# Altium PCB PCB1.PcbDoc
Units mm, origin at the board's own origin, x right, y up, seen from the top; angles counter-clockwise.
Board outline 47.5 x 54.5 mm, 2 copper layers (Top Layer, Bottom Layer); 29 components, 26 nets, 145 pads, 38 vias.
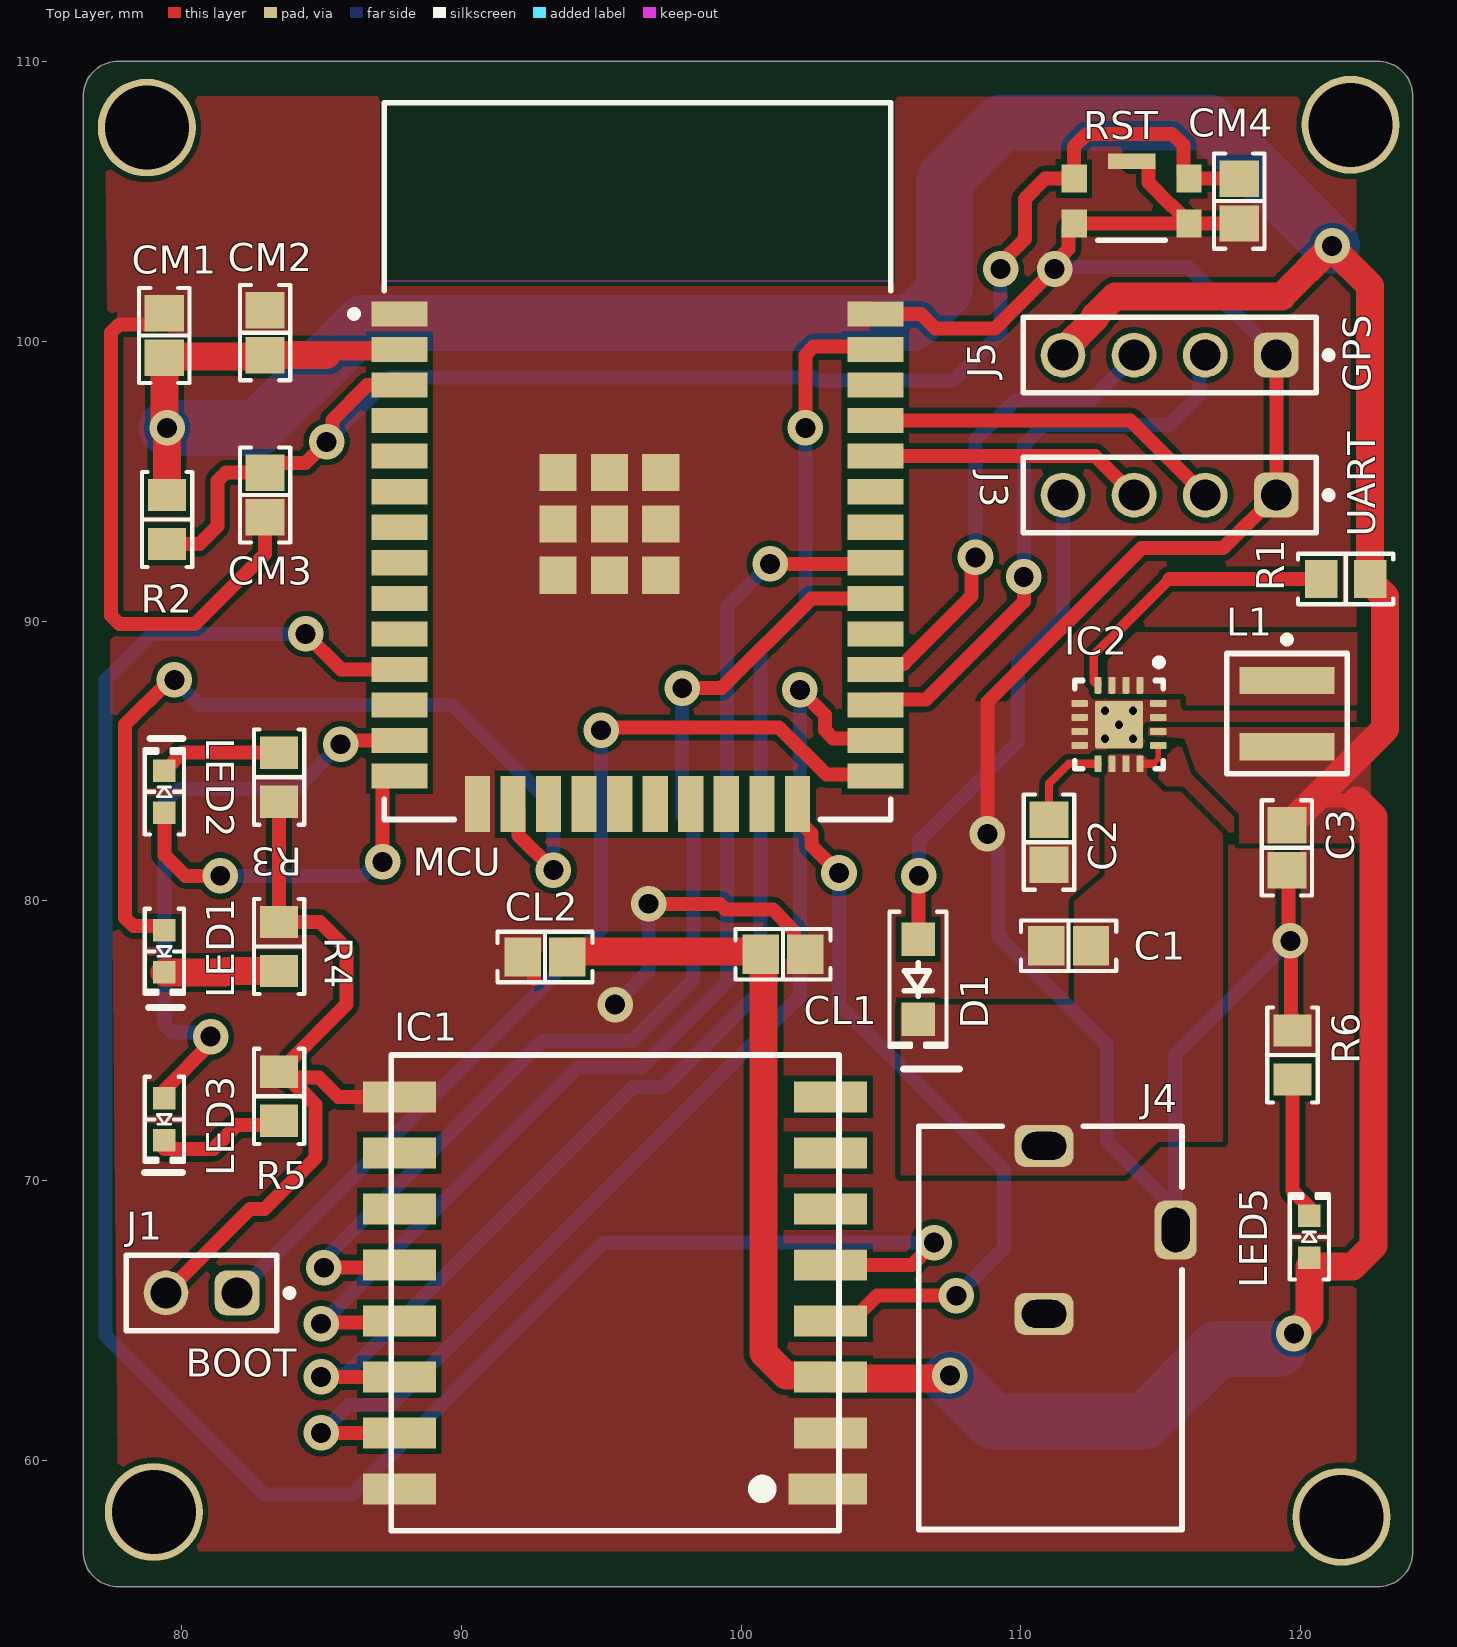
[diagram p0: Top Layer view]
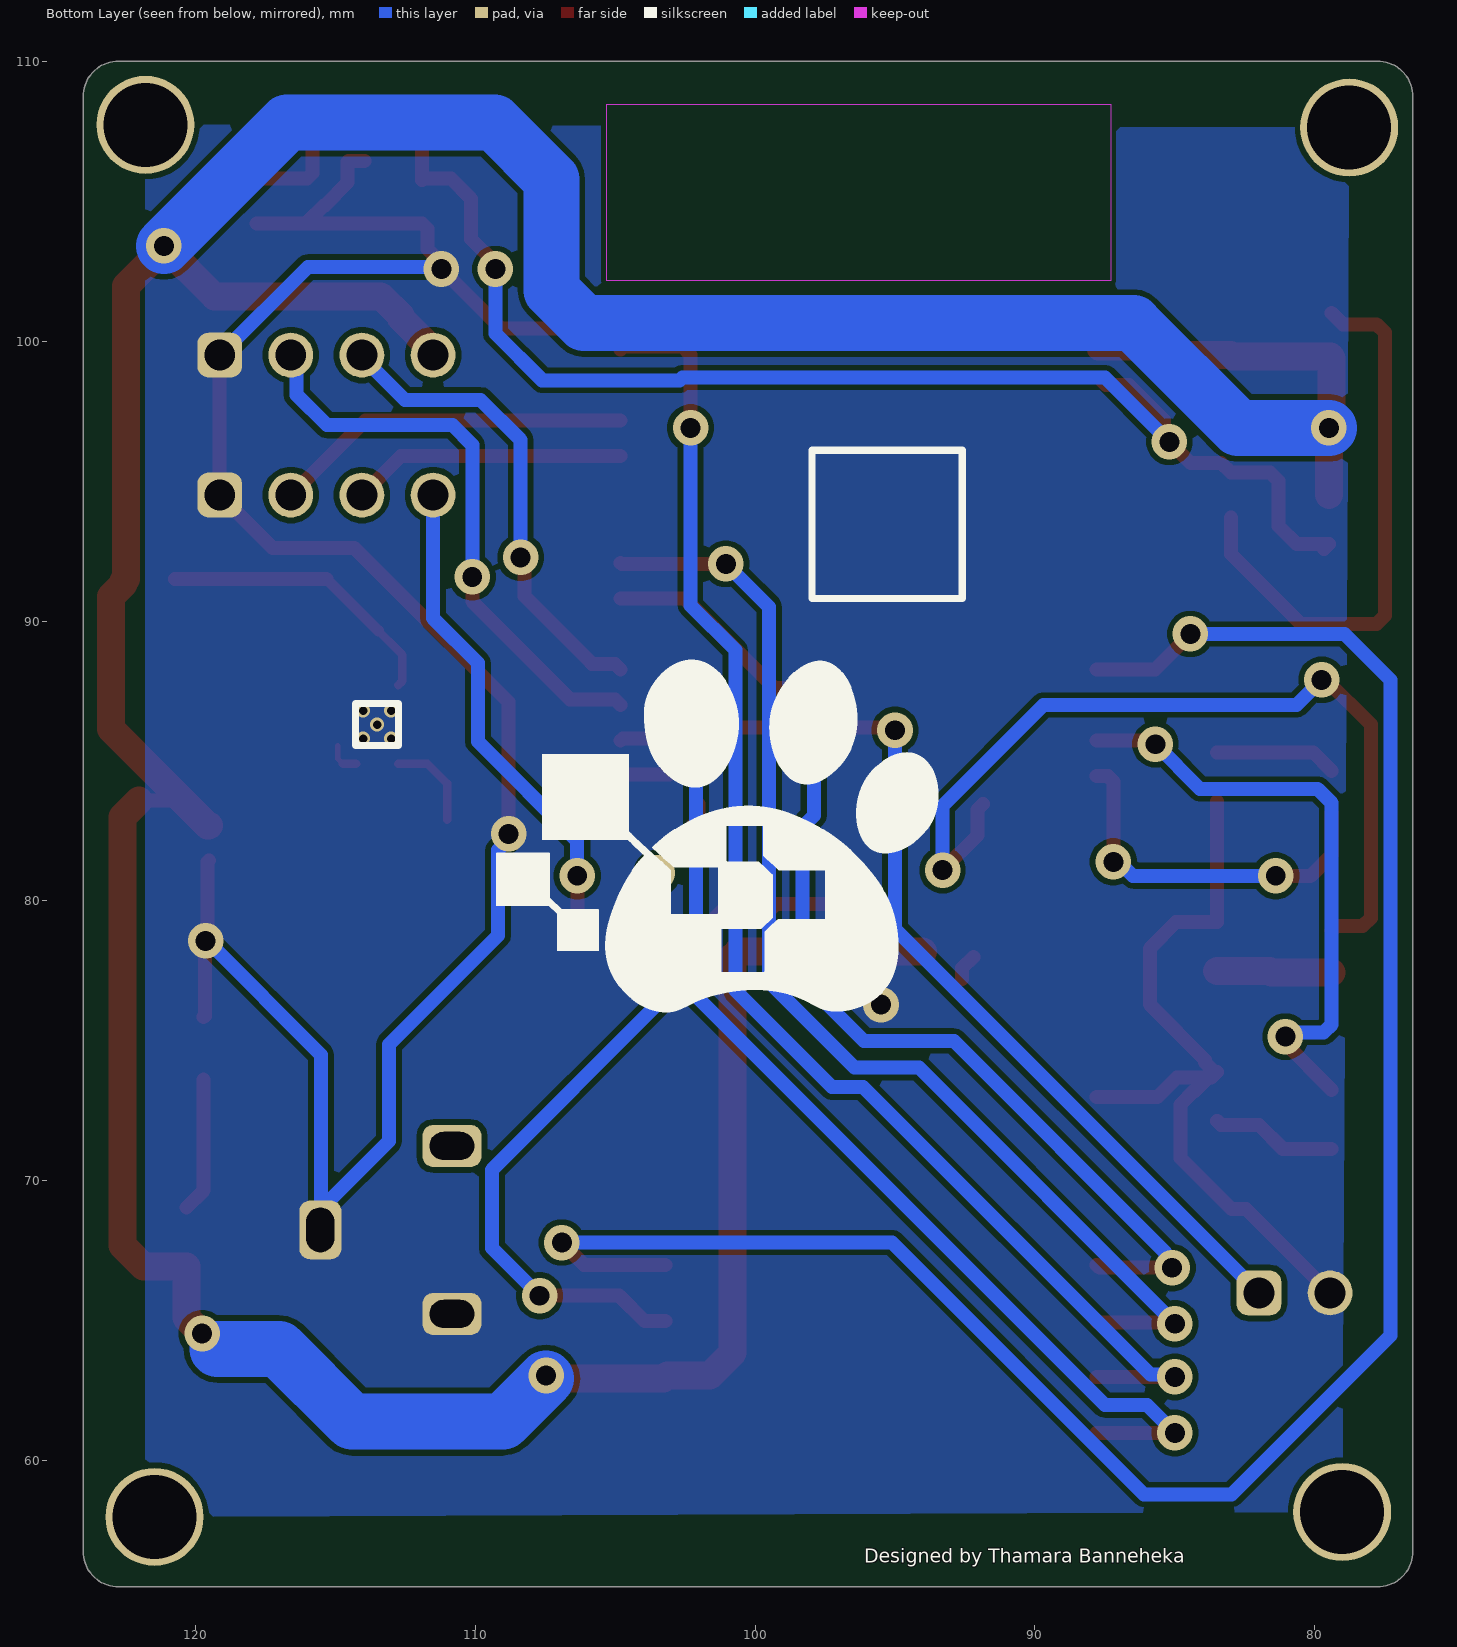
[diagram p1: Bottom Layer view, seen from below]
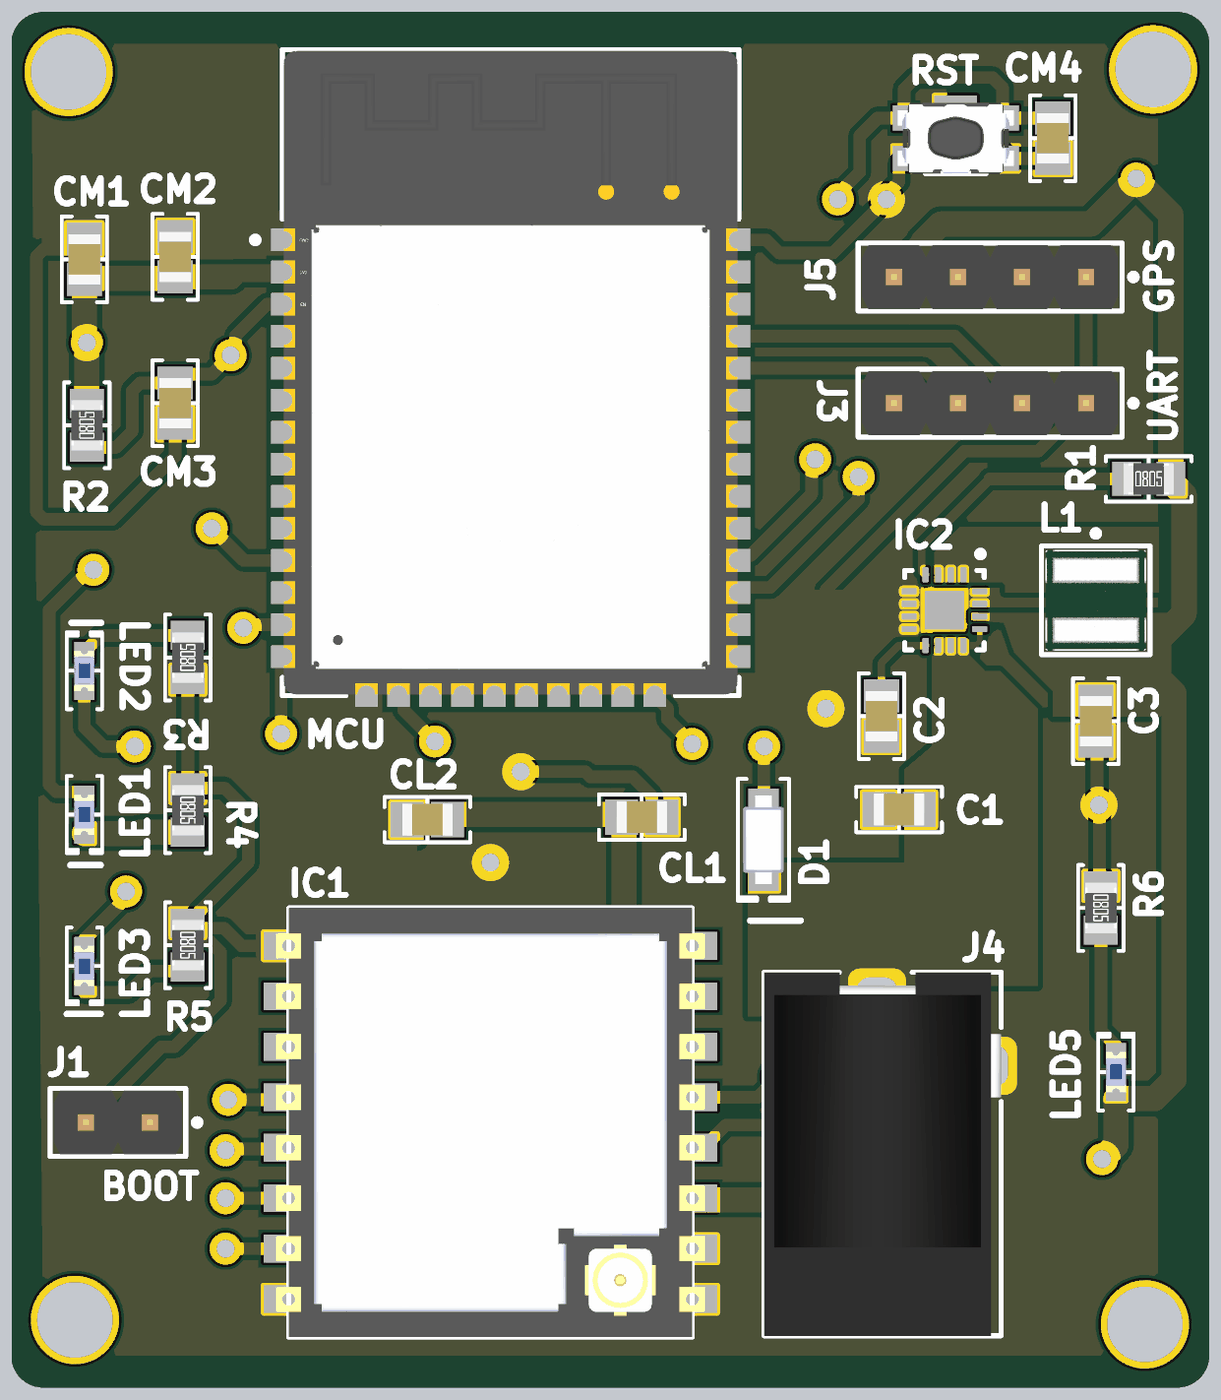
[diagram p2: 3D render of the assembled board from above, using the file's embedded part models]

## Layer stack, top to bottom
Top Solder: solder mask 0.0102, Solder Resist, Dk 3.5
Top Layer: signal copper 0.0356
Dielectric 1: dielectric 0.32, FR-4, Dk 4.8
Bottom Layer: signal copper 0.0356
Bottom Solder: solder mask 0.0102, Solder Resist, Dk 3.5

## Board outline
76.5,56.77 76.5,108.73 cw(c77.77,108.73) 77.77,110 122.73,110 cw(c122.73,108.73) 124,108.73 124,56.77 cw(c122.73,56.77) 122.73,55.5 77.77,55.5 cw(c77.77,56.77)

## Design rules (kind name [scope] priority, off if disabled: settings)
Clearance [All] p1: gap=0.2 ignorepadtopadclearanceinfootprint=TRUE
MinimumSolderMaskSliver [All] p1: minsoldermaskwidth=0.1
NetAntennae [All] p1: netantennaetolerance=0.2
PasteMaskExpansion [All] p1: expansion=0 thpadusebottompaste=TRUE
PlaneConnect [All] p1: pad.planeconnectstyle=Relief pad.reliefexpansion=0.508 pad.reliefentries=4 pad.reliefconductorwidth=0.254 pad.reliefairgap=0.254 via.planeconnectstyle=Direct via.reliefexpansion=0.508 via.reliefentries=4 via.reliefconductorwidth=0.254 via.reliefairgap=0.254
PolygonConnect [All] p1: connectstyle=Direct reliefconductorwidth=0.254 reliefentries=4 polygonreliefangle="90 Angle" airgapwidth=0.254
RoutingVias [All] p1: holewidth=0.2 width=0.15 viastyle="Through Hole" minholewidth=0.2 minwidth=0.1 maxholewidth=0.711 maxwidth=1.27
SilkToSilkClearance [All] p1: silktosilkclearance=0.2
SilkToSolderMaskClearance [IsPad] p1: minsilkscreentomaskgap=0.2 clearancetoexposedcopper=TRUE
SolderMaskExpansion [All] p1 off: expansion=0.102 istentingtop=TRUE soldermaskfromhole=TRUE
SupplyNets "Schematic Supply Nets_2" [InNet('3V3')] p1: voltage=0.000
SupplyNets "Schematic Supply Nets_1" [InNet('VIN')] p2: voltage=0.000
SupplyNets "Schematic Supply Nets" [InNet('GND')] p3: voltage=0.000
UnRoutedNet [All] p1: checkbadconnections=TRUE
Width [All] p1: maxlimit=5 minlimit=0.2 preferedwidth=0.3 minimp=50.000000 maximp=50.000000 favimp=50.000000
23 further rules are at their usual default settings.

## Components (designator, comment, footprint, x,y, rotation, side; value= is the part's Value field where it differs from the comment)
C1 "10 µF" "CAP 0805_2012" 111.7,78.4 r0 top
C2 "3300 pF" "CAP 0805_2012" 111,82.1 r90 top
C3 "0.022 µF" "CAP 0805_2012" 119.5,81.9 r90 top
CL1 "22 µF" "CAP 0805_2012" 101.5,78.1 r180 top
CL2 "0.1 µF" "CAP 0805_2012" 93,78 r0 top
CM1 "22 µF" "CAP 0805_2012" 79.4,100.2 r270 top
CM2 "0.1 µF" "CAP 0805_2012" 83,100.3 r270 top
CM3 "0.1 µF" "CAP 0805_2012" 83,94.5 r90 top
CM4 "0.1 µF" "CAP 0805_2012" 117.8,105 r90 top
D1 "1N4007FLTR" SOD123F 106.325,77.2 r270 top
IC1 "RA-02" RA-02 95.5,66 r180 top
IC2 "TPS62152RGTR" RGT0016C_V 113.5,86.3 r270 top
J1 "BOOT" 61300211121 80.73,66 r180 top
J3 "UART" 61300411121 115.31,94.5 r180 top
J4 "PJ-102AH" "CUI PJ-102AH" 110.825,64.75 r180 top
J5 "GPS" 61300411121 115.31,99.5 r180 top
L1 "2.2uH" FP-XFL4020-MFG 119.5,86.69 r270 top
LED1 "Blue" "LED 0603_1608 BLUE" 79.4,78.2 r270 top
LED2 "Blue" "LED 0603_1608 BLUE" 79.4,83.9 r90 top
LED3 "Blue" "LED 0603_1608 BLUE" 79.4,72.2 r270 top
LED5 "Blue" "LED 0603_1608 BLUE" 120.3,68 r90 top
MCU "ESP32-WROOM-32" FP-ESP32-WROOM-32-MFG 96.3,95.71 r0 top
R1 "100 k" "RES 0805_2012" 121.6,91.5 r0 top
R2 "10 k" "RES 0805_2012" 79.5,93.625 r90 top
R3 "1 k" "RES 0805_2012" 83.5,84.422 r90 top
R4 "1 k" "RES 0805_2012" 83.5,78.375 r270 top
R5 "1 k" "RES 0805_2012" 83.5,73.025 r270 top
R6 "1 k" "RES 0805_2012" 119.7,74.5 r270 top
RST "KMR221GLFS" SW_KMR221GLFS 113.95,105 r0 top

## Footprints (in the part's own frame and the unit in brackets; to place one, negate y for a bottom-side part, rotate by r counter-clockwise, add the part's x,y. Pads: shape width x height; smd on the part's side, far side on the other; paste and mask are expansions set on the pad)
61300211121 [mm] "Pin Header, pitch 2.54 mm, THT, Vertical, single row, 2p"
  rrect50% 1.6x1.6 hole 1.1: 1(-1.27,0)
  round 1.6 hole 1.1: 2(1.27,0)
  silkscreen extent -3.26,-1.35 2.69,1.35, body extent -2.54,-1.27 2.54,1.27, height 8.57
61300411121 [mm] "Pin Header, pitch 2.54 mm, THT, Vertical, single row, 4p"
  rrect50% 1.6x1.6 hole 1.1: 1(-3.81,0)
  round 1.6 hole 1.1: 2(-1.27,0) 3(1.27,0) 4(3.81,0)
  silkscreen extent -5.8,-1.35 5.23,1.34, body extent -5.08,-1.27 5.08,1.27, height 8.57
"CAP 0805_2012" [mm] "Chip Capacitor, 2-Leads, Body 2.00x1.20mm, IPC Medium Density"
  rect 1.3x1.4 smd: 1(-0.8,0) 2(0.8,0)
  silkscreen extent -1.7,-0.9 1.7,0.9, body extent -1,-0.64 1,0.64, height 1.26
"CUI PJ-102AH" [mm] "DC Barrel Jack W/ Switch 2.0x5.5"
  rrect50% 2.1x1.5 hole 1 slot 1.6 at 0 deg: 1(0,-6.5) 2(0,-0.5)
  rrect50% 1.5x2.1 hole 1 slot 1.6 at 90 deg: 3(-4.7,-3.5)
  silkscreen extent -4.92,-7.2 4.47,7.2, body extent -4.92,-7.2 4.47,7.2, height 11
FP-ESP32-WROOM-32-MFG [mm]
  rect 2x0.9 smd paste+0 mask+0: 1(-8.5,5.26) 2(-8.5,3.99) 3(-8.5,2.72) 4(-8.5,1.45) 5(-8.5,0.18) 6(-8.5,-1.09) 7(-8.5,-2.36) 8(-8.5,-3.63) 9(-8.5,-4.9) 10(-8.5,-6.17) 11(-8.5,-7.44) 12(-8.5,-8.71) 13(-8.5,-9.98) 14(-8.5,-11.25) 25(8.5,-11.25) 26(8.5,-9.98) 27(8.5,-8.71) 28(8.5,-7.44) 29(8.5,-6.17) 30(8.5,-4.9) 31(8.5,-3.63) 32(8.5,-2.36) 33(8.5,-1.09) 34(8.5,0.18) 35(8.5,1.45) 36(8.5,2.72) 37(8.5,3.99) 38(8.5,5.26)
  rect 0.9x2 smd paste+0 mask+0: 15(-5.715,-12.25) 16(-4.445,-12.25) 17(-3.175,-12.25) 18(-1.905,-12.25) 19(-0.635,-12.25) 20(0.635,-12.25) 21(1.905,-12.25) 22(3.175,-12.25) 23(4.445,-12.25) 24(5.715,-12.25)
  rect 1.33x1.33 smd paste+0 mask+0: 39(-2.835,-4.075) 39(-2.835,-2.24) 39(-2.835,-0.405) 39(-1,-4.075) 39(-1,-2.24) 39(-1,-0.405) 39(0.835,-4.075) 39(0.835,-2.24) 39(0.835,-0.405)
  Keep-Out Layer region: -9,6.45 9,6.45 9,12.75 -9,12.75
  Keep-Out Layer region: -9,6.45 9,6.45 9,12.75 -9,12.75
  silkscreen extent -10.25,-12.8 9.05,12.8, body extent -9.6,-13.35 9.6,12.9, height 0.25
FP-XFL4020-MFG [mm]
  rect 0.98x3.4 smd paste+0 mask+0: 1(-1.185,0) 2(1.185,0)
  silkscreen extent -2.77,-2.15 2.15,2.15, body extent -2.25,-2.25 2.25,2.25, height 0.25
"LED 0603_1608 BLUE" [mm] "Chip Diode, 2-Leads, Body 1.60x0.80mm, IPC Medium Density"
  rect 0.8x0.8 smd: 1(-0.75,0) 2(0.75,0)
  silkscreen extent -1.52,-0.7 1.52,0.7, body extent -0.8,-0.4 0.8,0.4, height 0.53
RA-02 [mm]
  rect 2.8x1.1 smd: 1(-7.6,7)
  rect 2.6x1.1 smd: 2(-7.7,5) 3(-7.7,3) 4(-7.7,1) 5(-7.7,-1) 6(-7.7,-3) 7(-7.7,-5) 8(-7.7,-7) 9(7.7,-7) 10(7.7,-5) 11(7.7,-3) 12(7.7,-1) 13(7.7,1) 14(7.7,3) 15(7.7,5) 16(7.7,7)
  silkscreen extent -8,-8.5 8,8.5, body extent -8.5,-8.5 8.5,8.5, height 3.3
"RES 0805_2012" [mm] "Chip Resistor, 2-Leads, Body 2.00x1.25mm, IPC Medium Density"
  rect 1.15x1.35 smd: 1(-0.875,0) 2(0.875,0)
  silkscreen extent -1.7,-0.9 1.7,0.9, body extent -1,-0.62 1,0.63, height 0.6
RGT0016C_V [mm] "QFN, 16-Leads, Body 3x3mm, Pitch 0.5mm, Thermal Pad 1.65x1.65mm"
  rrect40% 0.6x0.25 smd: 1(-1.4,0.75) 2(-1.4,0.25) 3(-1.4,-0.25) 4(-1.4,-0.75) 9(1.4,-0.75) 10(1.4,-0.25) 11(1.4,0.25) 12(1.4,0.75)
  rrect40% 0.25x0.6 smd: 5(-0.75,-1.4) 6(-0.25,-1.4) 7(0.25,-1.4) 8(0.75,-1.4) 13(0.75,1.4) 14(0.25,1.4) 15(-0.25,1.4) 16(-0.75,1.4)
  rrect6% 1.7x1.7 smd paste-0.85: 17(0,0)
  rrect6% 1.55x1.55 on Top Paste: 17(0,0)
  silkscreen extent -2.35,-1.58 1.57,1.58, body extent -1.5,-1.5 1.5,1.5, height 1
SOD123F [mm] "SODFL, 2-Leads, Body 1.60x3.50mm, IPC Medium Density"
  rect 1.2x1.2 smd: 1(-1.43,0) 2(1.43,0)
  silkscreen extent -2.41,-1.02 2.41,1.02, body extent -1.75,-0.8 1.75,0.8, height 1.1
SW_KMR221GLFS [mm]
  rect 0.9x1 smd: 1(-2.05,0.8) 2(-2.05,-0.8) 3(2.05,-0.8) 4(2.05,0.8)
  rect 1.7x0.55 smd: 5(0,1.425)
  silkscreen extent -1.2,-1.4 1.2,-1.4, body extent -2.3,-1.4 2.3,1.4, height 1.9

## Part data
C1: library part C2012X6S1C106K125AC, "CAP CER 10UF 16V X6S 0805", Device Package="0805 (2012 Metric)", manufacturer="TDK Corporation", Operating Temperature="-55°C ~ 105°C", Supplier Part Number 1=445-7611-1-ND, Temperature Coefficient=X6S, Tolerance=±10%, Voltage - Rated=16V, Applications="General Purpose", Capacitance="10 µF", componentlink1description=Datasheet, componentlink1url=https://product.tdk.com/info/en/catalog/datasheets/mlcc_commercial_general_en.pdf?ref_disty=digikey, componentlink2description="DigiKey Link", componentlink2url=https://www.digikey.com/en/products/detail/tdk-corporation/C2012X6S1C106K125AC/2733046, Features="Low ESL", lastupdated="2/9/2024 8:16:08 PM", Lifecycle Status=Active, Minimum Order=1, Mounting Type="Surface Mount, MLCC", Package / Case="0805 (2012 Metric)", packaging=TapeAndReel, Part Number=C2012X6S1C106K125AC, Part Status=Active, partid=2995, price=0.06, series=C, Size / Dimension="0.079\" L x 0.049\" W (2.00mm x 1.25mm)", Supplier 1=DigiKey, Thickness (Max)="0.057\" (1.45mm)"
C2: library part C0805C332F5GECAUTO, "CAP CER 0805 3.3NF 50V C0G 1%", Capacitance="3.3 nF", Device Package="0805 (2012 Metric)", manufacturer=KEMET, Operating Temperature="-55°C ~ 125°C", Ratings=AEC-Q200, Supplier Part Number 1=399-C0805C332F5GECAUTOCT-ND, Temperature Coefficient="C0G, NP0", Tolerance=±1%, Voltage - Rated=50V, Applications="Automotive, ESD Protection", componentlink1description=Datasheet, componentlink1url=https://api.kemet.com/component-edge/download/datasheet/C0805C332F5GECAUTO.pdf, componentlink2description="DigiKey Link", componentlink2url=https://www.digikey.com/en/products/detail/kemet/C0805C332F5GECAUTO/8647273, Features="Low ESL", lastupdated="2/9/2024 8:15:00 PM", Lifecycle Status=Active, Minimum Order=1, Mounting Type="Surface Mount, MLCC", Package / Case="0805 (2012 Metric)", packaging=TapeAndReel, Part Number=C0805C332F5GECAUTO, Part Status=Active, partid=41544, price=0.27, series="ESD SMD Auto C0G", Size / Dimension="0.079\" L x 0.049\" W (2.00mm x 1.25mm)", Supplier 1=DigiKey, Thickness (Max)="0.035\" (0.88mm)"
C3: library part C0805C223K5RECAUTO, "CAP CER 0805 22NF 50V X7R 10%", Capacitance="22 uF", Device Package="0805 (2012 Metric)", manufacturer=KEMET, Operating Temperature="-55°C ~ 125°C", Ratings=AEC-Q200, Supplier Part Number 1=399-17886-1-ND, Temperature Coefficient=X7R, Tolerance=±10%, Voltage - Rated=50V, Applications="Automotive, ESD Protection", componentlink1description=Datasheet, componentlink1url=https://api.kemet.com/component-edge/download/datasheet/C0805C223K5RECAUTO.pdf, componentlink2description="DigiKey Link", componentlink2url=https://www.digikey.com/en/products/detail/kemet/C0805C223K5RECAUTO/8640480, lastupdated="2/9/2024 8:15:30 PM", Lifecycle Status=Active, Minimum Order=1, Mounting Type="Surface Mount, MLCC", Package / Case="0805 (2012 Metric)", packaging=TapeAndReel, Part Number=C0805C223K5RECAUTO, Part Status=Active, partid=15719, price=0.04, series="ESD SMD Auto X7R", Size / Dimension="0.079\" L x 0.049\" W (2.00mm x 1.25mm)", Supplier 1=DigiKey, Thickness (Max)="0.035\" (0.88mm)"
CL1 CM1: library part CL21A226KOQNNNG, "CAP CER 22UF 16V X5R 0805", Device Package="0805 (2012 Metric)", manufacturer="Samsung Electro-Mechanics", Operating Temperature="-55°C ~ 85°C", Supplier Part Number 1=1276-7092-1-ND, Temperature Coefficient=X5R, Tolerance=±10%, Voltage - Rated=16V, Applications="General Purpose", Capacitance="22 µF", componentlink1description=Datasheet, componentlink1url=//media.digikey.com/pdf/Data%20Sheets/Samsung%20PDFs/CL21A226KOQNNNG_Spec.pdf, componentlink2description="DigiKey Link", componentlink2url=https://www.digikey.com/en/products/detail/samsung-electro-mechanics/CL21A226KOQNNNG/3894433, lastupdated="2/9/2024 8:16:07 PM", Lifecycle Status=Active, Minimum Order=1, Mounting Type="Surface Mount, MLCC", Package / Case="0805 (2012 Metric)", packaging=TapeAndReel, Part Number=CL21A226KOQNNNG, Part Status=Active, partid=3000, price=0.06, series=CL, Size / Dimension="0.079\" L x 0.049\" W (2.00mm x 1.25mm)", Supplier 1=DigiKey, Thickness (Max)="0.055\" (1.40mm)"
CL2 CM2 CM3 CM4: library part CC0805MRX7R9BB104, "CAP CER 0.1UF 50V X7R 0805", Device Package="0805 (2012 Metric)", manufacturer=Yageo, Operating Temperature="-55°C ~ 125°C", Supplier Part Number 1=311-4351-1-ND, Temperature Coefficient=X7R, Tolerance=±20%, Voltage - Rated=50V, Applications="General Purpose", Capacitance="0.1 µF", componentlink1description=Datasheet, componentlink1url=https://www.yageo.com/upload/media/product/productsearch/datasheet/mlcc/UPY-GPHC_X7R_6.3V-to-50V_18.pdf, componentlink2description="DigiKey Link", componentlink2url=https://www.digikey.com/en/products/detail/yageo/CC0805MRX7R9BB104/5884281, lastupdated="2/9/2024 8:16:09 PM", Lifecycle Status=Active, Minimum Order=1, Mounting Type="Surface Mount, MLCC", Package / Case="0805 (2012 Metric)", packaging=TapeAndReel, Part Number=CC0805MRX7R9BB104, Part Status=Active, partid=2475, price=0.01, series=CC, Size / Dimension="0.079\" L x 0.049\" W (2.00mm x 1.25mm)", Supplier 1=DigiKey, Thickness (Max)="0.037\" (0.95mm)"
D1: "STANDARD RECTIFIER 1000V SOD-123", Capacitance @ Vr, F="15pF @ 4V, 1MHz", Current - Average Rectified (Io)=1A, Current - Reverse Leakage @ Vr="5µA @ 1000V", manufacturer="SMC Diode Solutions", Package / Case=SOD-123F, Supplier Device Package=SOD-123FL, Supplier Part Number 1=1655-1N4007FLCT-ND, Voltage - DC Reverse (Vr) (Max)=1000V, Voltage - Forward (Vf) (Max) @ If="1.1V @ 1A", componentlink1description=Datasheet, componentlink1url=http://www.smc-diodes.com/propdf/1N4001FL-1N4007FL%20N1646%20REV.A.pdf, componentlink2description="DigiKey Link", componentlink2url=http://digikey.com/product-detail/en/smc-diode-solutions/1N4007FLTR/1655-1N4007FLCT-ND/11657827, Diode Type=Standard, lastupdated="8/30/2020 8:59:55 PM", Lifecycle Status=Active, Minimum Order=1, Mounting Type="Surface Mount", packaging=TapeAndReel, Part Number=1N4007FLTR, partid=3314, price=0.01, Speed="Standard Recovery >500ns, > 200mA (Io)", Supplier 1=DigiKey
IC1: library part CMP-006-000001-1, "General ISM < 1GHz LoRaâ„¢ Transceiver Module 410MHz ~ 525MHz Antenna Not Included, I-PEX Surface Mount", Package=None, Availability="Not in stock", Check_prices=https://www.snapeda.com/parts/RA-02/AI-Thinker/view-part/?ref=eda, Component Type=Standard, Design Item ID=RA-02, MF=Ai-Thinker, MP=RA-02, Pin Count=16, price=None, SnapEDA_Link=https://www.snapeda.com/parts/RA-02/AI-Thinker/view-part/?ref=snap, Source=RA-02.SchLib
IC2: library part CMP-0323-00110-3, "Buck Step Down Regulator with 3 to 17 V Input and 3.3 V Output, -40 to 85 degC, 16-Pin QFN (RGT), Green (RoHS & no Sb/Br)", manufacturer="Texas Instruments", Rating=Catalog, Switch Current Limit(Typ)(A)=1.7, Code_JEDEC=MO-220, componentlink1description=Datasheet, componentlink1url=http://www.ti.com/general/docs/lit/getliterature.tsp?genericPartNumber=TPS62152&fileType=pdf, componentlink2description="Package Specification", componentlink2url=http://www.ti.com/litv/pdf/mpqf119g, ComponentLink3Description="URL Link1", ComponentLink3URL="Samples URL:http://www.ti.com/product/tps62152#samples", DatasheetVersion=SLVSAL5, Duty Cycle(Max)(%)=100, Eco-Plan="Green (RoHS & no Sb/Br)", Iout(Max)(A)=1, Iq(Typ)(mA)=0.017, Mounting Technology="Surface Mount", PackageDescription="16-Pin Plastic Quad Flat No-Lead, 3 x 3 mm Body, 0.5 mm Pitch, 1.7 x 1.7 mm Exposed Pad", PackageReference=RGT0016C, PackageVersion="revH, Oct-2011", PartNumber=TPS62152RGTR, Preset Vout(V)=3.3, Regulated Outputs(#)=1, SubFamily="Step-Down Regulator", Synchronous Rectification=TRUE, Topology=Buck, Vin(Max)(V)=17, Vin(Min)(V)=3, Vout(Max)(V)=3.3, Vout(Min)(V)=3.3
J1: library part 61300211121, "WR-PHD Pin Header, THT, Vertical, pitch 2.54mm, 1 Row, 2P", Contact Resistance=20mOhm, manufacturer="Wurth Elektronik", Operating Temperature Max=105°C, Operating Temperature Min=-40°C, Rated Current=3A, Withstanding Voltage=500V, Working Voltage=250V, Category="Board-to-Board Connectors", componentlink1description="Website Link", componentlink1url=https://www.we-online.com/redexpert/article/61300211121?ad, componentlink2description="Datasheet Link", componentlink2url=https://www.we-online.com/redexpert/spec/61300211121?ad, Gender="Pin Header", Manufacturer Part Number=61300211121, Match Code=WR-PHD, Mount="Through Hole", Number of Pins=2, Number of Rows=1, Orientation=Vertical, packaging=Bag, Pitch=2.54mm
J3 J5: library part 61300411121, "WR-PHD Pin Header, THT, Vertical, pitch 2.54mm, 1 Row, 4P", Contact Resistance=20mOhm, manufacturer="Wurth Elektronik", Operating Temperature Max=105°C, Operating Temperature Min=-40°C, Rated Current=3A, Withstanding Voltage=500V, Working Voltage=250V, Category="Board-to-Board Connectors", componentlink1description="Website Link", componentlink1url=https://www.we-online.com/redexpert/article/61300411121?ad, componentlink2description="Datasheet Link", componentlink2url=https://www.we-online.com/redexpert/spec/61300411121?ad, Gender="Pin Header", Manufacturer Part Number=61300411121, Match Code=WR-PHD, Mount="Through Hole", Number of Pins=4, Number of Rows=1, Orientation=Vertical, packaging=Bag, Pitch=2.54mm
J4: "CONN PWR JACK 2X5.5MM SOLDER", Current Rating (Amps)=5A, manufacturer="CUI Devices", Material Flammability Rating="UL94 V-0", Supplier Part Number 1=CP-102AH-ND, Voltage - Rated=24VDC, Actual Diameter="0.079\" (2.00mm ID), 0.256\" (6.50mm OD)", componentlink1description=Datasheet, componentlink1url=https://www.cuidevices.com/product/resource/digikeypdf/pj-102ah.pdf, componentlink2description="DigiKey Link", componentlink2url=//digikey.com/product-detail/en/cui-devices/PJ-102AH/CP-102AH-ND/408448, Connector Type=Jack, Gender=Male, Industry Recognized Mating Diameter="2.00mm ID (0.079\"), 5.50mm OD (0.217\")", Internal Switch(s)="Single Switch, Normally Closed", lastupdated="12/16/2019 7:01:27 PM", Lifecycle Status=0, Mating Length/Depth="0.354\" (9.00mm)", Minimum Order=1, Mounting Type="Through Hole, Right Angle", Number of Positions/Contacts="2 Conductors, 3 Contacts", packaging=Tray, Part Number=PJ-102AH, Part Status=Active, price=0.76, series=-, Shielding=Unshielded, Supplier 1=DigiKey, Termination=Solder
L1: library part CMP-2000-05090-4, "INDUCTOR, 2.2UH, 8A, 20%, 38MHZ, REEL", Case/Package=SMD/SMT, DC Resistance (DCR)=23.5mR, Inductance Tolerance=20%, Max DC Current=8A, Max Operating Temperature=125°C, Min Operating Temperature=-40°C, Saturation Current=3.1A, Self Resonant Frequency=38MHz, Test Frequency=100kHz, Core Material=Composite, Height=2.1mm, Inductance=2.2uH, Lead Free="Contains Lead", Length=4.3mm, Mount="Surface Mount", packaging="Tape and Reel", REACH SVHC="No SVHC", RMS Current (Irms)=8A, RoHS Compliant=Yes, series=XFL4020, Shielding=Shielded, Termination=SMD/SMT, Tolerance=20%, Width=4.3mm
LED1 LED2 LED3: library part SM0603UBWC, "LED BLUE CLEAR 0603 SMD", Current - Test=20mA, Device Package="0603 (1608 Metric)", Lens Color=Colorless, manufacturer="Bivar Inc.", Millicandela Rating=115mcd, Supplier Device Package=0603, Supplier Part Number 1=492-1327-1-ND, Voltage - Forward (Vf) (Typ)=3V, Color=Blue, componentlink1description=Datasheet, componentlink1url=https://www.bivar.com/Files/Datasheets/SM0603UBWC.pdf, componentlink2description="DigiKey Link", componentlink2url=https://www.digikey.com/en/products/detail/bivar-inc/SM0603UBWC/2408546, Configuration=Standard, Height (Max)=0.80mm, lastupdated="6/3/2024 7:57:52 PM", Lens Size="1.00mm x 0.80mm", Lens Style="Rectangle with Flat Top", Lens Transparency=Clear, Lifecycle Status=Active, Minimum Order=1, Mounting Type="Surface Mount", Package / Case="0603 (1608 Metric)", packaging=TapeAndReel, Part Number=SM0603UBWC, Part Status=Active, partid=807, price=0.46, series=-, Size / Dimension="1.60mm L x 0.80mm W", Supplier 1=DigiKey, Viewing Angle=130°, Wavelength - Dominant=470nm, Wavelength - Peak=468nm
LED5: library part LSM0603463V, "LED BLUE CLEAR CHIP 0603 SMD", Current - Test=20mA, Device Package="0603 (1608 Metric)", Lens Color=Colorless, manufacturer="Visual Communications Company - VCC", Millicandela Rating=20mcd, Supplier Device Package="Chip LED", Supplier Part Number 1=LSM0603463VCT-ND, Voltage - Forward (Vf) (Typ)=3V, Color=Blue, componentlink1description=Datasheet, componentlink1url=https://vcclite.com/wp-content/uploads/wpallimport/files/files/LSM0603463V.pdf, componentlink2description="DigiKey Link", componentlink2url=https://www.digikey.com/en/products/detail/visual-communications-company-vcc/LSM0603463V/9486725, Configuration=Standard, Height (Max)=0.50mm, lastupdated="6/3/2024 7:57:52 PM", Lens Size="1.20mm x 0.80mm", Lens Style="Rectangle with Flat Top", Lens Transparency=Clear, Lifecycle Status=Active, Minimum Order=1, Mounting Type="Surface Mount", Package / Case="0603 (1608 Metric)", packaging=TapeAndReel, Part Number=LSM0603463V, Part Status=Active, partid=781, price=0.12, series=LSM0603, Size / Dimension="1.60mm L x 0.80mm W", Supplier 1=DigiKey, Viewing Angle=120°, Wavelength - Dominant=469nm, Wavelength - Peak=469nm
MCU: library part CMP-194065-000008-1, "RX TXRX MOD WIFI SURFACE MOUNT", Case/Package=SMD/SMT, Frequency=2.5GHz, Max Operating Temperature=85°C, Min Operating Temperature=-40°C, Operating Supply Voltage=3.6V, Package Quantity=550, Data Rate=150Mbps, Mount="Surface Mount", packaging="Cut Tape", Sensitivity=-98dBm, Weight=0.088185oz
R1 R2: library part RCS0805100KFKEA, "RES SMD 100K OHM 1% 1/2W 0805", Device Package="0805 (2012 Metric)", manufacturer="Vishay Dale", Operating Temperature="-55°C ~ 155°C", Power (Watts)="0.5W, 1/2W", Ratings=AEC-Q200, Resistance="100 kOhms", Supplier Device Package=0805, Supplier Part Number 1=541-2850-1-ND, Temperature Coefficient=±100ppm/°C, Tolerance=±1%, componentlink1description=Datasheet, componentlink1url=http://www.vishay.com/docs/20065/rcse3.pdf, componentlink2description="DigiKey Link", componentlink2url=https://www.digikey.com/en/products/detail/vishay-dale/RCS0805100KFKEA/5866996, Composition="Thick Film", Features="Automotive AEC-Q200, Pulse Withstanding", Height - Seated (Max)="0.020\" (0.50mm)", lastupdated="2/8/2024 9:02:38 PM", Lifecycle Status=Active, Minimum Order=1, Number of Terminations=2, Package / Case="0805 (2012 Metric)", packaging=TapeAndReel, Part Number=RCS0805100KFKEA, Part Status=Active, partid=27789, price=0.02, series="RCS e3", Size / Dimension="0.079\" L x 0.049\" W (2.00mm x 1.25mm)", Supplier 1=DigiKey
R3 R4 R5 R6: library part RCS0805100KFKEA, "RES SMD 100K OHM 1% 1/2W 0805", Device Package="0805 (2012 Metric)", manufacturer="Vishay Dale", Operating Temperature="-55°C ~ 155°C", Power (Watts)="0.5W, 1/2W", Ratings=AEC-Q200, Resistance="1 kOhms", Supplier Device Package=0805, Supplier Part Number 1=541-2850-1-ND, Temperature Coefficient=±100ppm/°C, Tolerance=±1%, componentlink1description=Datasheet, componentlink1url=http://www.vishay.com/docs/20065/rcse3.pdf, componentlink2description="DigiKey Link", componentlink2url=https://www.digikey.com/en/products/detail/vishay-dale/RCS0805100KFKEA/5866996, Composition="Thick Film", Features="Automotive AEC-Q200, Pulse Withstanding", Height - Seated (Max)="0.020\" (0.50mm)", lastupdated="2/8/2024 9:02:38 PM", Lifecycle Status=Active, Minimum Order=1, Number of Terminations=2, Package / Case="0805 (2012 Metric)", packaging=TapeAndReel, Part Number=RCS0805100KFKEA, Part Status=Active, partid=27789, price=0.02, series="RCS e3", Size / Dimension="0.079\" L x 0.049\" W (2.00mm x 1.25mm)", Supplier 1=DigiKey
RST: library part CMP-009-000003-1, "Switch Tactile N.O. SPST Button Gull Wing 0.05A 32VDC 1VA 200000Cycles 2N SMD Automotive T/R", Package=None, Availability=Unavailable, Component Type=Standard, Design Item ID=KMR221GLFS, MP=KMR221GLFS, Pin Count=5, price=None, Source=KMR221GLFS.SchLib

## Free pads (board coordinates)
  round 3.5 hole 3: 1(79.025,58.175) 2(121.775,107.725) 3(78.775,107.625) 4(121.45,58)

## Via types
v1: diameter 1.27, hole 0.711, Top Layer to Bottom Layer, 33 vias
v2: diameter 0.5, hole 0.3, Top Layer to Bottom Layer, 5 vias

## Nets (pads, with @x,y where several pads share a name; then routed paths per layer and width w, separated by ;. In a path a pad name is that pad's centre, name@x,y a point inside that pad or via, vN(x,y) a via of type N, cw(c..) or ccw(c..) an arc to the next point about the centre after c; other vN are vias at no path point)
3V3: C3.2 CL1.2 CL2.2 CM1.2 CM2.2 IC1.3 IC2.14 J5.4 L1.2 LED5.1 MCU.2 R1.2 R2.2 | length 162.8
  Top Layer w0.5: CL2.2 CL2.2@94,78.2 ; CL1.2@100.6,78.2 CL1.2 CL1.2@100.8,78 ; IC1.3 IC1.3@103.26,62.94 ; 120.465,83.593 122.007,83.593
  Top Layer w0.7: 85.2,99.5 85.35,99.65 87.75,99.65 MCU.2
  Top Layer w1: R2.2 v1(79.5,96.9) 79.5,96.973 79.4,97.073 CM1.2 79.45,99.45 82.95,99.45 CM2.2 85.2,99.5 ; CL2.2@94,78.2 CL1.2@100.6,78.2 ; CL1.2@100.8,78 100.8,63.858 101.608,63.05 103.15,63.05 IC1.3 ; IC1.3@103.26,62.94 v1@107.46,62.94 ; J5.4 111.5,99.662 112.653,100.815 112.653,100.893 113.36,101.6 119.315,101.6 v1(121.115,103.4) 121.115,103.327 122.475,101.967 R1.2 122.55,91.425 122.55,91.325 123,90.875 123,86.15 119.55,82.7 C3.2 ; v1(119.75,64.55) 120.3,65.1 120.3,66.95 121.85,66.95 122.6,67.7 122.6,83 122.007,83.593
  Bottom Layer w2: v1(79.5,96.9) 82.75,96.9 86.489,100.639 106.103,100.639 107.275,101.811 107.275,105.775 109.3,107.8 116.715,107.8 v1(121.115,103.4) ; v1@107.46,62.94 109,61.4 114.4,61.4 117,64 119.2,64
  other v1: 107.46,63.05
EN: CM3.2 CM4.2 MCU.3 R2.1 RST.1 RST.4 | length 53.6
  Top Layer w0.5: R2.1@79.675,92.575 R2.1 80.65,92.75 81.3,93.4 81.3,95 81.6,95.3 CM3.2 83.35,95.65 84.45,95.65 v1(85.2,96.4) 85.4,96.6 85.4,97.176 86.649,98.425 87.465,98.425 MCU.3@87.665,98.625 ; v1(109.275,102.575) 109.275,102.783 110.138,103.646 110.138,105.083 110.855,105.8 RST.1 ; RST.1@111.9,105.75 111.9,106.95 112.35,107.4 115.4,107.4 115.8,107 115.8,106 RST.4 CM4.2
  Bottom Layer w0.5: v1(85.2,96.4) 87.5,98.7 102.59,98.7 102.69,98.6 107.6,98.6 109.275,100.275 v1(109.275,102.575)
GND: C1.1 C2.1 C3.1 CL1.1 CL2.1 CM1.1 CM2.1 CM3.1 CM4.1 IC1.1 IC1.2 IC1.9 IC1.16 IC2.5 IC2.6 IC2.7 IC2.8 IC2.15 IC2.16 IC2.17@113.5,86.3 J1.2 J3.1 J4.2 J4.3 J5.1 MCU.1 MCU.15 MCU.38 MCU.39 R3.1 R4.1 R5.1 R6.1 RST.2 RST.3 RST.5 | length 144.2
  Top Layer w0.5: CM1.1 79,100.6 77.793,100.6 77.5,100.307 77.5,90.193 77.793,89.9 80.503,89.9 83,92.397 CM3.1 ; J1.2 82.46,69 82.979,69 84.8,70.821 84.8,72.736 84.315,73.221 84.279,73.221 R5.1@83.8,73.7 ; R3.1 R4.1 84.957,79.25 85.9,78.307 85.9,76.3 83.925,74.325 83.925,74.225 83.6,73.9 R5.1 83.7,73.7 R5.1@83.8,73.7 ; IC1.9 85.625,73 84.925,73.7 R5.1@83.8,73.7 ; CL2.1 92.6,77.6 92.6,77.214 ; v1(96.7,79.9) 99.254,79.9 99.454,79.7 101.136,79.7 101.9,78.936 101.9,78.5 CL1.1 ; MCU.38 106.43,100.97 106.948,100.452 109.078,100.452 v1(111.2,102.575) 111.2,102.783 111.7,103.283 111.7,104 RST.2 RST.3 ; v1(108.8,82.4) 108.8,87.1 114.3,92.6 117.22,92.6 J3.1 J5.1 ; RST.5 114.525,106.425 114.55,106.4 114.55,105.664 115.364,104.85 115.4,104.85 116,104.25 RST.3 ; CM4.1 RST.3 ; C3.1@119.5,81.45 119.55,81.4 v1@119.55,78.65 ; v1@119.65,78.55 119.65,75.9 R6.1@119.7,75.85
  Bottom Layer w0.5: v1@95.6,76.4 96.7,77.5 v1(96.7,79.9) ; v1(108.8,82.4) 108.8,82.192 109.175,81.817 109.175,78.775 113.075,74.875 113.075,71.425 J4.3@115.5,69 ; v1(111.2,102.575) 111.273,102.648 115.972,102.648 J5.1 ; J4.3@115.5,68.7 J4.3@115.5,69 ; v1@119.55,78.65 v1@119.6,78.6 ; v1@119.65,78.55 v1(119.625,78.575) v1@119.6,78.6 ; J4.3@115.5,69 115.5,74.5 v1@119.6,78.6
  other v1: 95.5,76.3
  other v2: 113,85.8 114,85.8 113.5,86.3 113,86.8 114,86.8
IRO: IC1.5 MCU.11 | length 74.8
  Top Layer w0.5: v1(84.45,89.54) 85.72,88.27 MCU.11 ; IC1.5 106.1,67 v1(106.9,67.8)
  Bottom Layer w0.5: v1(84.45,89.54) 78.94,89.54 78.6,89.2 77.3,87.9 77.3,64.475 82.975,58.8 86.1,58.8 95.1,67.8 v1(106.9,67.8)
LED1: LED2.1 MCU.14 | length 13.2
  Top Layer w0.5: LED2.1 79.4,81.65 80.15,80.9 v1(81.4,80.9) ; v1(87.2,81.4) 87.2,84.26 87.4,84.46 MCU.14
  Bottom Layer w0.5: v1(81.4,80.9) 86.492,80.9 v1@86.992,81.4
LED2: LED1.1 MCU.16 | length 31.4
  Top Layer w0.5: LED1.1 79.25,79.1 78.3,79.1 78,79.4 78,86.3 v1@79.6,87.9 ; MCU.16 92.055,83.26 92.055,82.345 v1(93.3,81.1)
  Bottom Layer w0.5: v1(79.759,87.9) 80.659,87 89.7,87 93.3,83.4 v1(93.3,81.1)
LED3: LED3.1 MCU.13 | length 21.4
  Top Layer w0.5: LED3.1@79.4,73.25 81.053,74.903 v1(81.053,75.153) ; v1@86.03,85.73 MCU.13
  Bottom Layer w0.5: v1@81.2,75.3 79.693,75.3 79.4,75.593 79.4,83.5 79.9,84 84.1,84 v1(85.7,85.6)
MISO: IC1.13 MCU.31 | length 41.7
  Top Layer w0.5: v1@85.05,64.95 87.75,64.95 IC1.13 ; v1@101,92 v1(101.04,92.04) 104.76,92.04 MCU.31
  Bottom Layer w0.5: v1@85.05,64.95 v1(85,64.9) 94.15,74.05 96.45,74.05 99.5,77.1 99.5,90.5 v1@101,92
MOSI: IC1.14 MCU.37 | length 50.2
  Top Layer w0.5: v1(85,63) IC1.14 ; v1(102.3,96.9) 102.3,99.507 102.593,99.8 104.7,99.8 MCU.37
  Bottom Layer w0.5: v1(85,63) 85.079,63.079 85.879,63.079 96.15,73.35 97.25,73.35 100.7,76.8 100.7,88.96 102.3,90.56 v1(102.3,96.9)
NetC2_2: C2.2 IC2.9 | length 3.3
  Top Layer w0.3: C2.2 111,84.2 111.7,84.9 IC2.9
NetD1_1: D1.1 J3.4 | length 18
  Top Layer w0.5: D1.1 106.338,78.643 106.338,80.887 v1(106.35,80.9)
  Bottom Layer w0.5: v1(106.35,80.9) 106.35,82.15 109.9,85.7 109.9,88.5 111.5,90.1 J3.4
NetIC2_1: IC2.1 IC2.2 IC2.3 L1.1
NetIC2_4: IC2.4 R1.1 | length 10.4
  Top Layer w0.3: IC2.4 112.6,87.85 112.6,88.8 112.775,88.975 113.45,89.65
  Top Layer w0.4: 113.45,89.65 115.3,91.5
  Top Layer w0.5: 115.3,91.5 R1.1
NetJ1_1: J1.1 MCU.25 | length 36.1
  Top Layer w0.5: v1@94.9,86.2 101.361,86.2 103.05,84.511 104.749,84.511 MCU.25
  Bottom Layer w0.5: J1.1 95,79 v1(95,86.1)
NetJ3_2: J3.2 MCU.35 | length 12.9
  Top Layer w0.5: MCU.35 113.92,97.16 J3.2
NetJ3_3: J3.3 MCU.34 | length 9.8
  Top Layer w0.5: MCU.34 112.65,95.89 J3.3
NetLED1_2: LED1.2 R4.2 | length 4.1
  Top Layer w1: LED1.2 81.55,77.45 81.6,77.5 R4.2
NetLED2_2: LED2.2 R3.2 | length 4.4
  Top Layer w0.5: LED2.2 80.047,85.297 R3.2
NetLED3_2: LED3.2 R5.2 | length 4.5
  Top Layer w0.5: LED3.2@79.4,71.15 81.15,71.15 82,72 83.35,72 R5.2
NetLED5_2: LED5.2 R6.2 | length 4.8
  Top Layer w0.5: R6.2 119.7,69.65 LED5.2@120.3,69.05
NSS: IC1.15 MCU.26 | length 41.2
  Top Layer w0.5: v1(85,61) IC1.15 ; v1(102.1,87.541) 103,86.641 103,86.1 103.293,85.807 104.723,85.807 MCU.26
  Bottom Layer w0.5: v1(85,61) 86,62 87.5,62 102.1,76.6 v1@102.1,87.7
RST: IC1.4 MCU.24 | length 26.2
  Top Layer w0.5: MCU.24 102.015,82.91 102.521,82.404 102.521,81.979 v1(103.5,81) ; IC1.4 103.95,65 104.85,65.9 v1(107.694,65.9)
  Bottom Layer w0.5: v1(103.5,81) 103.5,76.3 109.4,70.4 109.4,67.6 v1@107.704,65.904
RX2: J5.2 MCU.27 | length 20.9
  Top Layer w0.5: MCU.27 105,87.2 106.6,87.2 110.1,90.7 v1(110.1,91.578)
  Bottom Layer w0.5: v1(110.1,91.578) 110.1,96.286 110.811,96.996 115.296,96.996 116.37,98.07 116.37,99.29 J5.2
SCK: IC1.12 MCU.30 | length 39.5
  Top Layer w0.5: v1(85.1,66.9) 87.7,66.9 IC1.12 ; v1(97.9,87.6) 99.3,87.6 102.51,90.81 MCU.30
  Bottom Layer w0.5: v1(85.1,66.9) 85,66.8 85,67.008 85.329,67.338 85.329,67.429 92.9,75 96.1,75 98.3,77.2 98.3,82.646 97.9,83.046 v1(97.9,87.6)
TX2: J5.3 MCU.28 | length 17.1
  Top Layer w0.5: MCU.28 105,88.47 105.816,88.47 105.986,88.64 106.25,88.904 108.236,90.89 108.236,92.136 v1(108.375,92.275)
  Bottom Layer w0.5: v1(108.375,92.275) 108.375,96.475 109.8,97.9 112.507,97.9 114.04,99.433 J5.3
VIN: C1.2 D1.2 IC2.10 IC2.11 IC2.12 IC2.13 J4.1 | length 1.2
  Top Layer w0.2: 114.724,84.9 114.9,85.076 IC2.13
  Top Layer w0.3: IC2.12 114.724,84.9
pads on no net: IC1.6 IC1.7 IC1.8 IC1.10 IC1.11 IC2.17@113.5,86.3 MCU.4 MCU.5 MCU.6 MCU.7 MCU.8 MCU.9 MCU.10 MCU.12 MCU.17 MCU.18 MCU.19 MCU.20 MCU.21 MCU.22 MCU.23 MCU.29 MCU.32 MCU.33 MCU.36

## Polygon pours and split planes (outlines as drawn)
GND on Top Layer "GND_L01_P024" (solid, pour order 24): 77.293,108.739 121.975,108.73 121.975,56.77 77.77,56.77
3V3 on Top Layer "3V3_L01_P015" (solid, pour order 15): 119.5,86.2 122.5,86.2 122.5,82.5 122.071,82.071 117.8,82.071 117.8,83.1 116.25,84.65 115.85,85.8 114.5,85.9 114.5,86.2 114.6,86.2
GND on Top Layer "GND_L01_P021" (solid, pour order 21): 115.287,87.116 115.287,86.316 114.257,86.316 114.257,85.316 113.387,85.316 111.087,85.316 109.987,84.216 109.987,81.866 111.987,81.866 111.987,80.316 111.437,80.316 111.437,77.216 107.912,77.216 107.912,87.116
VIN on Top Layer "VIN_L01_P019" (solid, pour order 19): 113,85.3 114.5,85.3 114.5,84.5 115.1,83.9 115.7,83.9 117.2,82.4 117.2,71.4 114.9,71.4 113.7,70.2 105.7,70.2 105.7,76.3 111.9,76.3 111.9,79.985 113,80.916
GND on Top Layer "GND_L01_P002" (solid, pour order 2): 89.442,88.9 99.8,88.9 99.8,101.994 87.417,101.994 82.175,103.494 77.712,103.494 77.712,100.6 89.442,100.6
GND on Top Layer "GND_L01_P023" (solid, pour order 23): 110.5,69.8 117,69.8 117,57.8 86.3,57.8 85.7,58.4 85.7,59.8 85.8,59.9 90,59.9 90,72.1 86.7,72.1 86.2,72.6 86.2,74.8 89.6,78.2 89.4,78.4 89.4,90.8 90,91.4 91.2,91.4 91.2,81.8 92.6,80.4 92.6,76.757 95.743,76.757 99.622,76.757 99.779,61.8 108.9,61.8 108.9,66.2 110.5,67.8
NetIC2_1 on Top Layer "NETIC2_1_L01_P016" (solid, pour order 16): 122.007,87.022 121.985,87 115.9,87 115.9,87.3 115.8,87.4 113.1,87.4 113.1,88.6 114.1,89.6 122.007,89.6
GND on Bottom Layer "GND_L02_P025" (solid, pour order 25): 78.775,107.625 121.775,107.725 121.775,58.325 121.45,58 79.025,58.175

## Silkscreen, mask and mechanical layers (free items; w line width, h text height)
Top Overlay:
  lines w0.254: 78.7,70.3 80.05,70.3 ; 78.846,76.2 80.046,76.2 ; 78.892,85.8 80.067,85.8 ; 105.8,74 107.8,74
Bottom Overlay:
  drawing of 14 lines, arcs and shapes, not listed
  text "Designed by Thamara Banneheka" at 96.1,56.367 h0.5
Mechanical 1:
  lines w0.254: 76.5,56.77 ccw(c77.77,56.77) 77.77,55.5 122.73,55.5 ccw(c122.73,56.77) 124,56.77 124,68.5 124,108.73 ccw(c122.73,108.73) 122.73,110 94.5,110 77.77,110 ccw(c77.77,108.73) 76.5,108.73 76.5,106.5 76.5,56.77

## Dimensions
122.73,55.5 to 122.73,110 on Drill Guide
76.5,106.5 to 124,108.73 on Drill Guide